# Altium PCB traffic_light_PCB.PcbDoc
Units mil, origin at the board's own origin, x right, y up, seen from the top; angles counter-clockwise.
Board outline 6000 x 4000 mil, 2 copper layers (Top Layer, Bottom Layer); 27 components, 45 nets, 193 pads, 1 vias.
Unrouted connection lines stored in the file: 2.
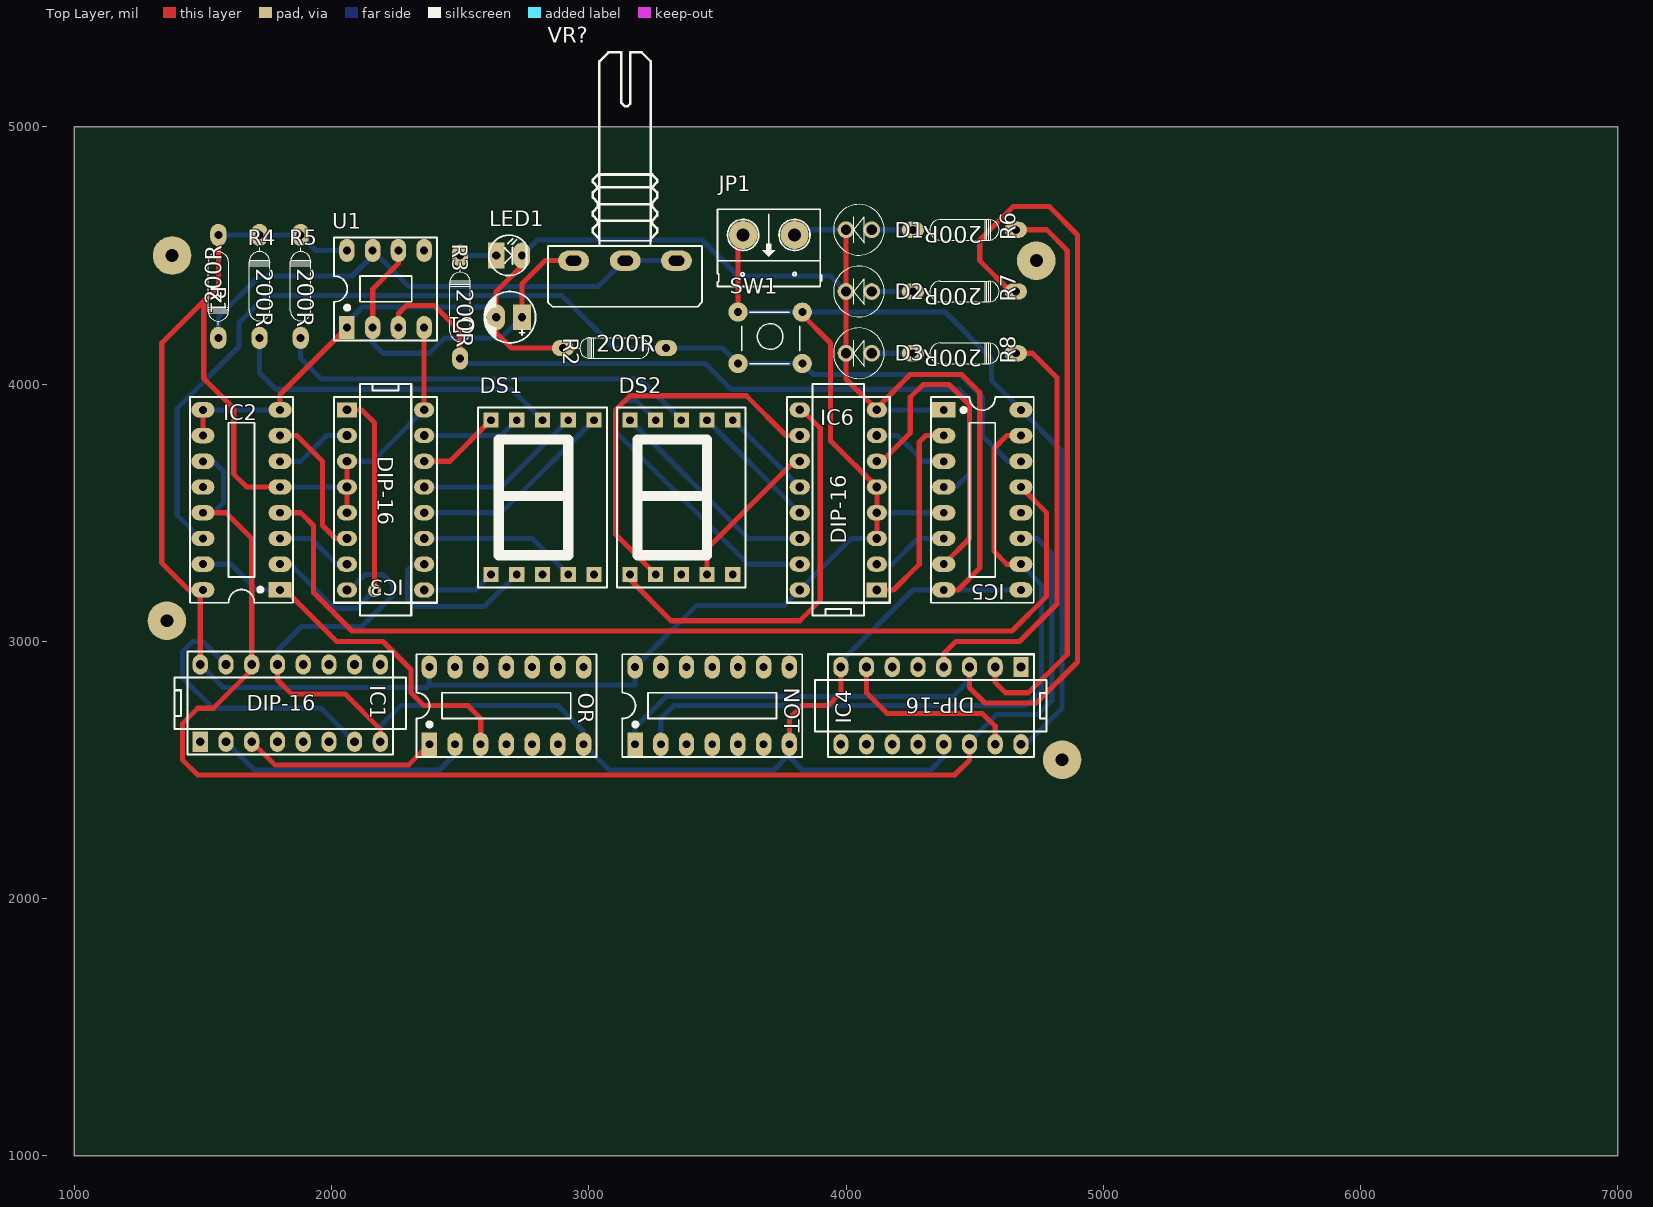
[diagram p0: Top Layer view]
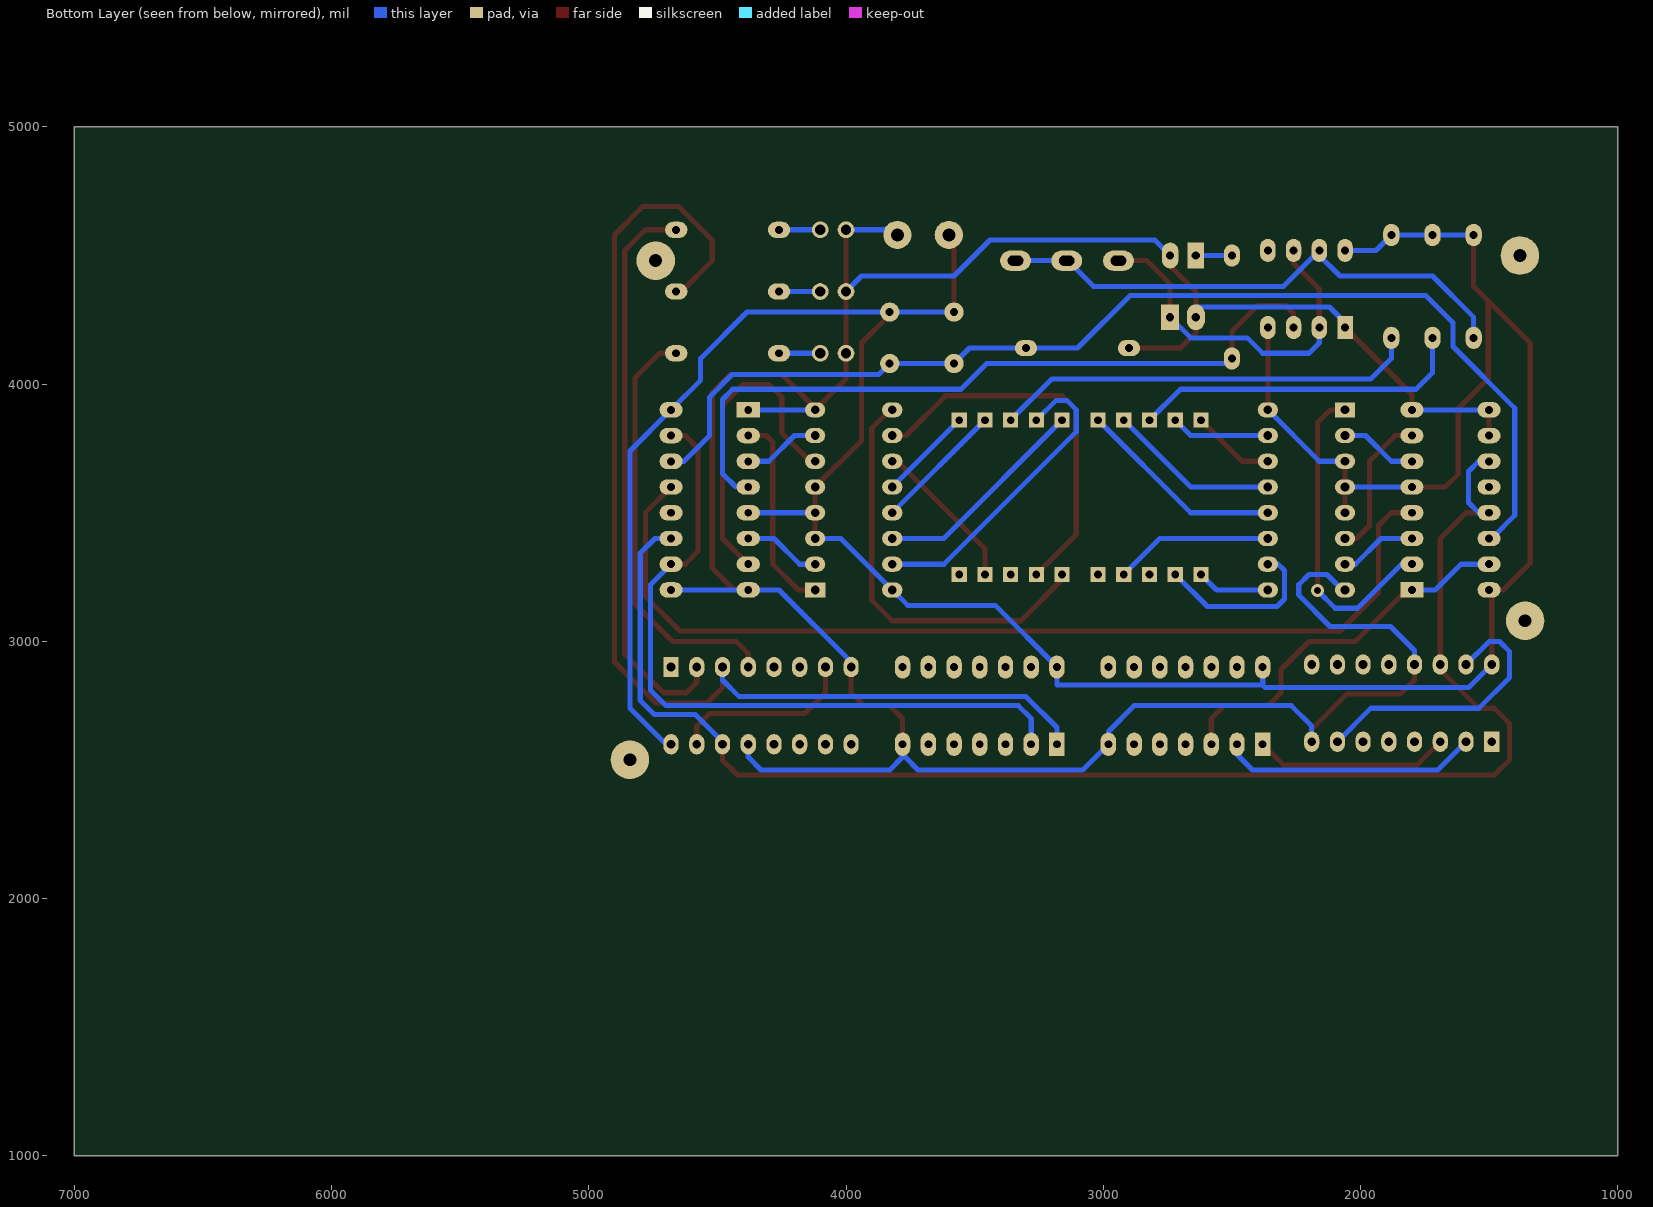
[diagram p1: Bottom Layer view, seen from below]
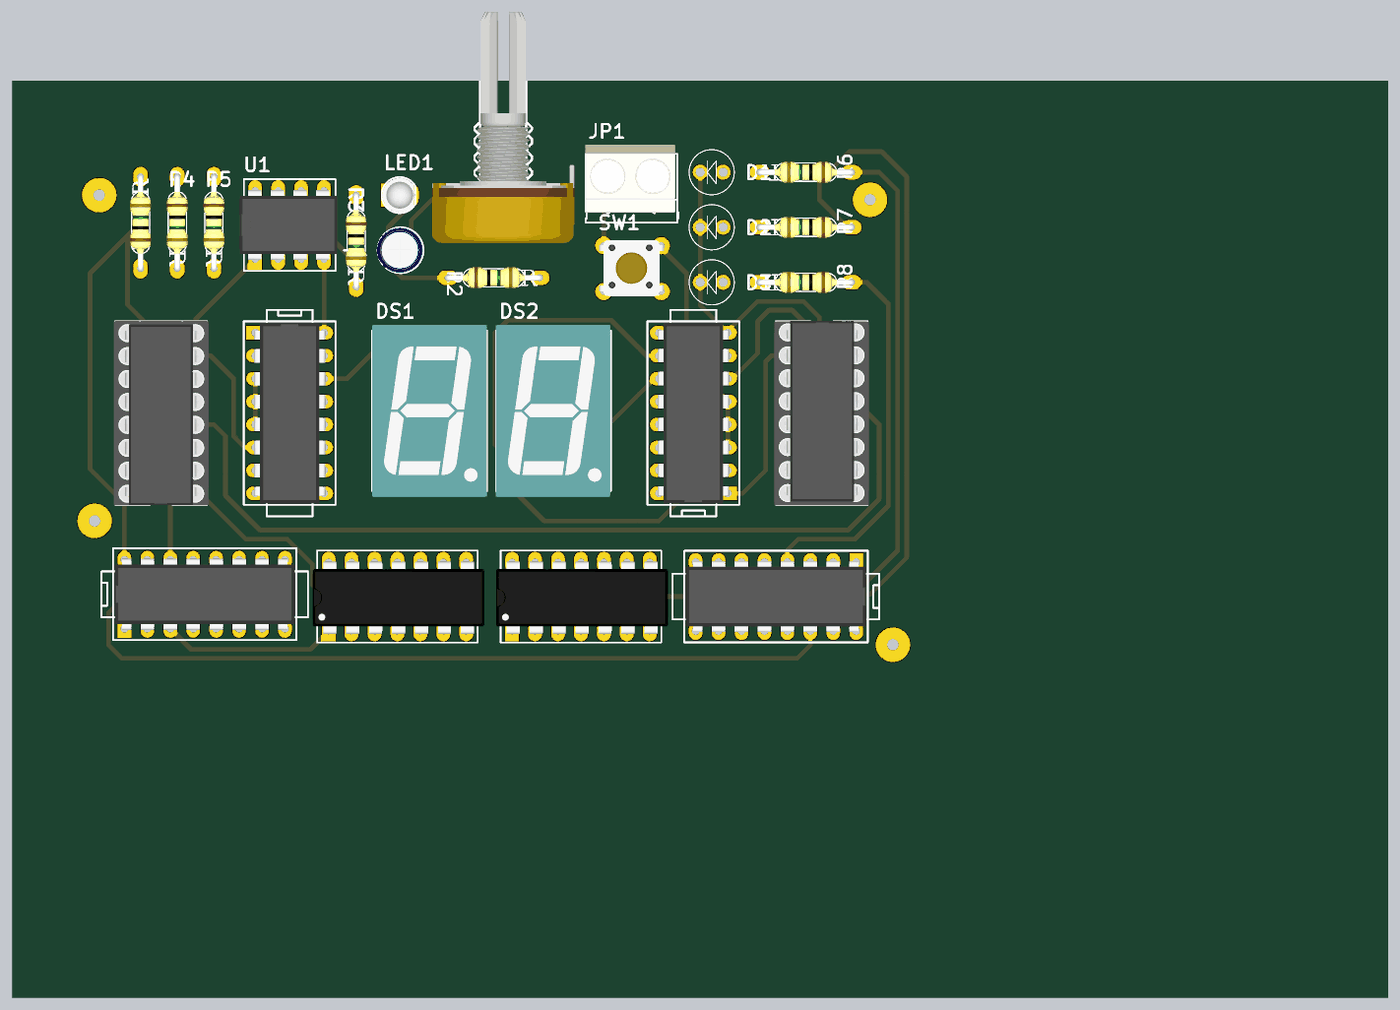
[diagram p2: 3D render of the assembled board from above, using the file's embedded part models]

## Layer stack, top to bottom
Top Solder: solder mask 0.4, Solder Resist, Dk 3.5
Top Layer: signal copper 1.4
Dielectric 1: dielectric 12.6, FR-4, Dk 4.8
Bottom Layer: signal copper 1.4
Bottom Solder: solder mask 0.4, Solder Resist, Dk 3.5

## Board outline
1000,1000 7000,1000 7000,5000 1000,5000

## Design rules (kind name [scope] priority, off if disabled: settings)
Clearance [All] p1: gap=15
PolygonConnect [All] p1: connectstyle=Relief reliefconductorwidth=10 reliefentries=4 polygonreliefangle="90 Angle" airgapwidth=10
RoutingVias [All] p1: holewidth=28 width=50 viastyle="Through Hole" minholewidth=28 minwidth=50 maxholewidth=28 maxwidth=50
SolderMaskExpansion [All] p1: expansion=4
Width [All] p1: maxlimit=30 minlimit=20 preferedwidth=20 minimp=50.000000 maximp=50.000000 favimp=50.000000
30 further rules are at their usual default settings.

## Components (designator, comment, footprint, x,y, rotation, side; value= is the part's Value field where it differs from the comment)
C1 "Cap Pol" CP1/2 2740,4260 r180 top
D1 "LED-RED-5MM" LED-5MM-RED 4100,4600 r180 top
D2 "LED-YELLOW-5MM" LED-5MM-YELLOW 4100,4360 r180 top
D3 "LED-GREEN-5MM" LED-5MM-GREEN 4100,4120 r180 top
DS1 "7SEG-A" LED7SEG 2819,3560 r0 top
DS2 "7SEG-A" LED7SEG 3359,3560 r0 top
IC1 "4017" DIP16 1840,2760 r0 top
IC2 "74193" DIP16/W0.3 1800,3200 r90 top
IC3 "7447" DIP16 2210.08,3549.71 r270 top
IC4 "4017" DIP16 4329.71,2749.92 r180 top
IC5 "74193" DIP16/W0.3 4380,3900 r270 top
IC6 "7447" DIP16 3969.92,3550.29 r90 top
JP1 "Header 2_1" HED2 3800,4580 r180 top
LED1 "LED" LED-3MM-WHITE 2640,4500 r0 top
NOT "7404" DIP14/W0.3 3180,2600 r0 top
OR "7432" DIP14/W0.3 2380,2600 r0 top
R1 "R0.4W" "DIEN TRO 1/4 W" 1560,4180 r90 top
R2 "R0.4W" "DIEN TRO 1/4 W" 2900,4140 r0 top
R3 "R0.4W" "DIEN TRO 1/4 W" 2500,4500 r270 top
R4 "R0.4W" "DIEN TRO 1/4 W" 1720,4580 r270 top
R5 "R0.4W" "DIEN TRO 1/4 W" 1880,4580 r270 top
R6 "R0.4W" "DIEN TRO 1/4 W" 4660,4600 r180 top
R7 "R0.4W" "DIEN TRO 1/4 W" 4660,4360 r180 top
R8 "R0.4W" "DIEN TRO 1/4 W" 4660,4120 r180 top
SW1 "SW" SW4 3580,4280 r0 top
U1 "NE555" DIP8 2205,4370 r0 top
VR? "50K" VR-S1 3141,4480 r180 top

## Footprints (in the part's own frame and the unit in brackets; to place one, negate y for a bottom-side part, rotate by r counter-clockwise, add the part's x,y. Pads: shape width x height; smd on the part's side, far side on the other; paste and mask are expansions set on the pad)
CP1/2 [mil] "Tu hoa < 22uF/16>50V"
  rect 70x100 hole 32: 1(0,0)
  oval 70x100 hole 32: 2(100,0)
  silkscreen extent -53,-100 147,100, body extent -49,-99 149,99, height 287
"DIEN TRO 1/4 W" [mm]
  oval 2.2x1.6 hole 0.787: 1(0,0) 2(10.16,0)
  silkscreen extent 1.26,-1.02 8.88,1.02, body extent -0.3,-1.16 10.46,1.16, height 2.93
DIP8 [mil] "DIP, 8-Leads, Row Spacing 7.62mm, Pitch 2.54mm, Body 9.91x6.73mm"
  rect 60x90 hole 31: 1(-145,-150)
  oval 60x90 hole 31: 2(-45,-150) 3(55,-150) 4(155,-150) 5(155,150) 6(55,150) 7(-45,150) 8(-145,150)
  silkscreen extent -195,-200 205,200, body extent -213,-153 213,153, height 177
DIP14/W0.3 [mil] "14PIN, W 300mil, Pin to pin 100mil"
  rect 60x90 hole 31: 1(0,0)
  oval 60x90 hole 31: 2(100,0) 3(200,0) 4(300,0) 5(400,0) 6(500,0) 7(600,0) 8(600,300) 9(500,300) 10(400,300) 11(300,300) 12(200,300) 13(100,300) 14(0,300)
  silkscreen extent -50,-50 650,350, body extent -70,-12 680,302, height 145
DIP16 [mm]
  rect 1.5x2 hole 0.864: 1(-8.897,-3.812)
  oval 1.5x2 hole 0.864: 2(-6.357,-3.812) 3(-3.817,-3.812) 4(-1.277,-3.812) 5(1.263,-3.812) 6(3.803,-3.812) 7(6.343,-3.812) 8(8.883,-3.812) 9(8.883,3.808) 10(6.343,3.808) 11(3.803,3.808) 12(1.263,3.808) 13(-1.277,3.808) 14(-3.817,3.808) 15(-6.357,3.808) 16(-8.897,3.808)
  silkscreen extent -11.44,-5.08 11.42,5.08, body extent -10,-3.93 10,3.94, height 1.99
DIP16/W0.3 [mil] "16 PIN, W 300mil, Pin to pin 100mil"
  rect 60x90 hole 31: 1(0,0)
  oval 60x90 hole 31: 2(100,0) 3(200,0) 4(300,0) 5(400,0) 6(500,0) 7(600,0) 8(700,0) 9(700,300) 10(600,300) 11(500,300) 12(400,300) 13(300,300) 14(200,300) 15(100,300) 16(0,300)
  silkscreen extent -50,-50 750,350, body extent -52,-57 752,356, height 299
HED2 [mil] "Header 2, 2 pin, hight 300mil, Pin to Pin 200, Colour Green"
  round 110 hole 50: 1(0,0) 2(200,0)
  silkscreen extent -106,-100 300,200, body extent -92,-140 302,155, height 394
LED7SEG [mil] "LED7SEG"
  round 60 on Top Overlay: 0(186,-210)
  rect 59.06x59.06 hole 30: 1(-199,-300) 2(-99,-300) 3(1,-300) 4(101,-300) 5(201,-300) 6(201,300) 7(101,300) 8(1,300) 9(-99,300) 10(-199,300)
  silkscreen extent -249,-350 251,350, body extent -250,-375 250,375, height 316
LED-3MM-WHITE [mil] "LED 2 PIN, 3ly Only colour"
  rect 65x100 hole 32: 1(0,0)
  oval 65x100 hole 32: 2(100,0)
  silkscreen extent -29,-78 118,79, body extent -25,-75 113,75, height 217
LED-5MM-GREEN [mil]
  round 65 hole 40: A(0,0) K(100,0)
  silkscreen extent -48,-98 148,98, body extent -54,-105 155,105, height 370
LED-5MM-RED [mil]
  round 65 hole 40: A(0,0) K(100,0)
  silkscreen extent -48,-98 148,98, body extent -54,-105 155,105, height 370
LED-5MM-YELLOW [mil]
  round 65 hole 40: A(0,0) K(100,0)
  silkscreen extent -48,-98 148,98, body extent -54,-105 155,105, height 370
SW4 [mil] "SW button 4pin, 250 x250 mil"
  round 75 hole 31: 1(0,0) 2(250,-200) 3(250,0) 4(0,-200)
  silkscreen extent 15,-215 240,0, body extent -36,-220 276,24, height 276
VR-S1 [mil]
  oval 120x78.74 hole 40 slot 60 at 0 deg: 1(-200,0) 2(-1,0) 3(200,0)
  silkscreen extent -299,-810 300,179, body extent -310,-818 310,188, height 839

## Part data
C1: "Polarized Capacitor (Radial)"
DS1 DS2: library part LED7SEG-A, "14.2 mm General Purpose Blue 7-Segment Display: CA, RH DP, Gray Surface"
IC1 IC4: "Decade Counter/Divider with 10 Decoded Outputs"
IC2 IC5: "Synchronous 4-Bit Up/Down Counter"
IC3 IC6: "BCD to 7-Segment Decoder/Driver"
JP1: "Header, 2-Pin"
LED1: "LED Single colour Green and Red"
NOT: "Hex Inverter"
OR: "Quad 2-Input OR Gate"
R1 R2 R3 R4 R5 R6 R7 R8: library part "Res 1/4 W", "Resistor"
SW1: library part SW4-1, "Switch button 4 pin"
U1: "TIMER IC"
VR?: library part VR-S, "Var Resistor"

## Free pads (board coordinates)
  round 150 hole 50: 2(1380,4500) 3(1360,3080) 4(4840,2540) 5(4740,4480)

## Via types
v1: diameter 50, hole 28, Top Layer to Bottom Layer, 1 vias

## Nets (pads, with @x,y where several pads share a name; then routed paths per layer and width w, separated by ;. In a path a pad name is that pad's centre, name@x,y a point inside that pad or via, vN(x,y) a via of type N, cw(c..) or ccw(c..) an arc to the next point about the centre after c; other vN are vias at no path point)
GND: C1.2 D1.K D2.K D3.K IC1.8 IC1.13 IC2.8 IC2.9 IC2.10 IC3.8 IC4.8 IC4.13 IC5.1 IC5.8 IC5.9 IC6.8 JP1.1 LED1.2 NOT.7 OR.7 R2.1 U1.1 | length 11363.1
  Top Layer w20: IC2.10 IC2.9 ; IC1.13 1789.71,2850 1843.71,2796 2052,2796 2189.71,2658.29 IC1.8 ; IC2.8 1800,3960 U1.1 ; LED1.2 2740,4460 2640,4360 C1.2 2640,4200 2700,4140 R2.1 ; NOT.7 3780,2700 3830,2750 3930,2750 3980,2800 IC4.8 ; D1.K D2.K D3.K 4000,4020 IC6.8 4120,3907 4250,4037 4450,4037 4520,3967 4520,3285 4435,3200 IC5.8
  Bottom Layer w20: IC2.9 IC2.8 ; IC1.13 1789.71,2965 1882.71,3058 2118,3058 2240,3180 2240,3220 2200,3260 2130,3260 2070,3200 IC3.8 ; U1.1 2060,4240 2120,4300 2640,4300 C1.2 ; IC1.8 2189.71,2670.71 2269,2750 2880,2750 2980,2650 OR.7 3080,2500 3720,2500 3770,2550 3780,2550 ; LED1.2 2800,4560 3440,4560 3580,4420 3940,4420 D2.K ; NOT.7 3780,2550 ; JP1.1 3800,4600 D1.K ; IC4.8 3980,2920 4260,3200 IC5.8 IC5.9 ; IC6.8 IC5.1 ; IC4.13 4380,2550 4330,2500 3830,2500 3780,2550
NetC1_1: C1.1 U1.2 U1.6 VR?.3 | length 1422.3
  Top Layer w20: U1.2 2160,4370 2260,4470 U1.6 ; C1.1 2740,4390 2830,4480 VR?.3@2939,4480
  Bottom Layer w20: U1.2 2160,4160 2200,4120 2380,4120 2440,4180 2660,4180 C1.1
NetD1_A: D1.A R6.2 | length 160
  Bottom Layer w20: D1.A R6.2
NetD2_A: D2.A R7.2 | length 160
  Bottom Layer w20: D2.A R7.2
NetD3_A: D3.A R8.2 | length 160
  Bottom Layer w20: D3.A R8.2
NetDS1_1: DS1.1 IC3.9 | length 284.9
  Bottom Layer w20: IC3.9 2560,3200 DS1.1
NetDS1_2: DS1.2 IC3.10 | length 674.6
  Bottom Layer w20: IC3.10 2320,3300 2295,3275 2295,3165 2325,3135 2595,3135 DS1.2
NetDS1_3: DS1.3 DS1.8 R4.2 | length 1312.2
  Bottom Layer w20: R4.2 1720,4044 1784,3980 2700,3980 DS1.8
NetDS1_4: DS1.4 IC3.11 | length 618
  Bottom Layer w20: IC3.11 2780,3400 DS1.4
NetDS1_6: DS1.6 IC3.12 | length 809.1
  Bottom Layer w20: IC3.12 2660,3500 DS1.6
NetDS1_7: DS1.7 IC3.13 | length 667.7
  Bottom Layer w20: IC3.13 2660,3600 DS1.7
NetDS1_9: DS1.9 IC3.15 | length 384.9
  Bottom Layer w20: IC3.15 2660,3800 DS1.9
NetDS1_10: DS1.10 IC3.14 | length 326.3
  Top Layer w20: IC3.14 2460,3700 DS1.10
NetDS2_1: DS2.1 IC6.9 | length 1635.1
  Top Layer w20: DS2.1 3160,3240 3320,3080 3820,3080 3900,3160 3900,3828.63 IC6.9@3824.31,3904.31
NetDS2_2: DS2.2 IC6.10 | length 1506.2
  Top Layer w20: DS2.2 3105,3415 3105,3900 3160,3955 3612,3955 3767,3800 IC6.10
NetDS2_3: DS2.3 DS2.8 R5.2 | length 1659.4
  Bottom Layer w20: R5.2 1880,4100 1960,4020 3200,4020 DS2.8
NetDS2_4: DS2.4 IC6.11 | length 600.8
  Top Layer w20: DS2.4 3460,3360 3800,3700 IC6.11
NetDS2_6: DS2.6 IC6.12 | length 367.7
  Bottom Layer w20: DS2.6 IC6.12
NetDS2_7: DS2.7 IC6.13 | length 509.1
  Bottom Layer w20: DS2.7 IC6.13
NetDS2_9: DS2.9 IC6.15 | length 1215.5
  Bottom Layer w20: DS2.9 3183,3937 3142,3937 3105,3900 3105,3815 3620,3300 IC6.15
NetDS2_10: DS2.10 IC6.14 | length 850.5
  Bottom Layer w20: DS2.10 3620,3400 IC6.14
NetIC1_2: IC1.2 OR.2 | length 1000.7
  Bottom Layer w20: IC1.2 1699.63,2500 2420,2500 2480,2560 OR.2
NetIC1_3: IC1.3 OR.1 | length 760.7
  Top Layer w20: IC1.3 1779.63,2520 2300,2520 OR.1
NetIC1_7: IC1.7 IC1.15 | length 1096.9
  Bottom Layer w20: IC1.15 1499.63,3000 1460,3000 1420,2960 1420,2860 1540,2740 1959.63,2740 IC1.7
NetIC1_14: IC1.14 IC2.11 IC2.13 IC4.14 IC5.11 | length 5834.9
  Top Layer w20: IC2.13 1589.71,3500 1689.71,3400 IC1.14 1689.71,2889.71 1540,2740 1480,2740 1420,2680 1420,2540 1480,2480 4422,2480 4480,2538 IC4.14
  Bottom Layer w20: IC2.13 1540,3500 1580,3540 1580,3660 1540,3700 IC2.11 ; IC4.14 4480,2610 4585,2715 4745,2715 4800,2770 4800,3343 4743,3400 IC5.11
NetIC2_1: IC2.1 IC2.15 OR.3 | length 1481.8
  Top Layer w20: IC2.1 1820,3200 2020,3000 2200,3000 2309,2891 2309,2800 2359,2750 2530,2750 2580,2700 OR.3
  Bottom Layer w20: IC2.15 1609.71,3300 1709.71,3200 IC2.1
NetIC2_2: IC2.2 IC3.1 | length 1246.1
  Top Layer w20: IC3.1 2117,3900 2167,3850 v1(2167,3198)
  Bottom Layer w20: IC2.2 1840,3300 2011,3129 2098,3129 v1(2167,3198)
NetIC2_3: IC2.3 IC3.7 | length 301.4
  Bottom Layer w20: IC2.3 1920,3400 2020,3300 IC3.7
NetIC2_4: IC2.4 IC5.13 | length 3845.2
  Top Layer w20: IC2.4 1880,3500 1930,3450 1930,3190 2080,3040 4645,3040 4780,3175 4780,3500 IC5.13
NetIC2_6: IC2.6 IC3.2 | length 301.4
  Bottom Layer w20: IC2.6 1880,3700 1980,3800 IC3.2
NetIC2_7: IC2.7 IC3.6 | length 572.1
  Top Layer w20: IC2.7 1865,3800 1965,3700 1965,3450 2015,3400 IC3.6
NetIC4_2: IC4.2 R6.1 | length 2221.8
  Top Layer w20: IC4.2 4580,2840 4620,2800 4710,2800 4860,2950 4860,4520 4780,4600 R6.1
NetIC4_3: IC4.3 NOT.1 R7.1 | length 4491.9
  Top Layer w20: IC4.3 4480,2820 4540,2760 4740,2760 4900,2920 4900,4580 4790,4690 4650,4690 4520,4560 4520,4480 4640,4360 R7.1
  Bottom Layer w20: NOT.1 3180,2665 3300,2785 4415,2785 4480,2850 IC4.3
NetIC4_4: IC4.4 R8.1 | length 1651.9
  Top Layer w20: IC4.4 4380,2953 4427,3000 4675,3000 4820,3145 4820,4025 4725,4120 R8.1
NetIC4_7: IC4.7 IC4.15 | length 723.8
  Top Layer w20: IC4.7 4080,2800 4160,2720 4530,2720 4580,2670 IC4.15
NetIC5_2: IC5.2 IC6.1 | length 786.8
  Top Layer w20: IC6.1 4185,3200 4285,3300 4285,3775 4310,3800 IC5.2
NetIC5_3: IC5.3 IC6.7 | length 301.4
  Bottom Layer w20: IC6.7 4200,3800 4300,3700 IC5.3
NetIC5_6: IC5.6 IC6.2 | length 301.4
  Bottom Layer w20: IC6.2 4180,3300 4280,3400 IC5.6
NetIC5_7: IC5.7 IC6.6 | length 1258.8
  Top Layer w20: IC6.6 4140,3700 4250,3810 4250,3949 4300,3999 4400,3999 4480,3919 4480,3400 IC5.7
NetIC5_10: IC5.10 IC5.15 NOT.2 | length 2800.1
  Top Layer w20: IC5.10 4625,3300 4575,3350 4575,3750 4625,3800 IC5.15
  Bottom Layer w20: NOT.2 3280,2700 3330,2750 4700,2750 4760,2810 4760,3220 IC5.10
NetLED1_1: LED1.1 R3.1 | length 160
  Bottom Layer w20: R3.1@2500,4480 R3.1 LED1.1
NetR1_1: R1.1 U1.7 VR?.1 VR?.2 | length 2077.6
  Bottom Layer w20: R1.1 1560,4260 1720,4420 2080,4420 2160,4500 U1.7 2300,4380 3037.11,4380 VR?.2@3139,4481.89 ; VR?.2@3140,4480 VR?.2 VR?.1@3339,4480
RST: IC2.14 IC5.14 R2.2 SW1.2 SW1.4 | length 4424.6
  Bottom Layer w20: IC2.14 1490,3400 1400,3490 1400,3906 1640,4146 1640,4239 1746,4345 2895,4345 3100,4140 R2.2 3520,4140 SW1.4 SW1.2 3873,4037 4443,4037 4530,3950 4530,3800 4630,3700 IC5.14
VCC: IC1.16 IC2.5 IC2.16 IC3.3 IC3.4 IC3.5 IC3.16 IC4.16 IC5.5 IC5.16 IC6.3 IC6.4 IC6.5 IC6.16 JP1.2 NOT.14 OR.14 R1.2 R4.1 R5.1 SW1.1 SW1.3 U1.4 U1.8 | length 11808.2
  Top Layer w20: IC1.16 IC2.16@1489.71,3200 ; IC2.16 IC2.16@1489.71,3200 ; R1.2 1560,4380 1503,4323 ; IC2.5 1670,3600 1620,3650 1620,3905 1503,4022 1503,4323 ; IC3.5 IC3.4 IC3.3 ; IC3.16 U1.4 ; SW1.1 3580,4560 JP1.2 ; SW1.3 3830,4270 3940,4160 3940,3780 IC6.5 IC6.4 IC6.3 ; IC2.16@1489.71,3200 1445,3200 1340,3305 1340,4160 1503,4323
  Bottom Layer w20: IC1.16 1579.63,2820 2370,2820 2380,2830 ; R1.2 R4.1 R5.1 1940,4520 U1.8 ; IC2.5 IC3.4 ; IC3.3 2160,3700 IC3.16 ; OR.14 2380,2830 ; SW1.1 SW1.3 4385,4280 4565,4100 4565,4015 IC5.16 4840,3740 4840,2740 4700,2600 IC4.16 ; IC6.3 4020,3400 IC6.16 3760,3140 3420,3140 NOT.14 3180,2830 2380,2830 ; IC6.4 IC5.5
ZZZ: IC5.4 R3.2 U1.3 | length 2909.7
  Top Layer w20: U1.3 2260,4275 2290,4305 2400,4305 2500,4205 R3.2
  Bottom Layer w20: R3.2 2520,4080 3453,4080 3553,3980 4440,3980 4480,3940 4480,3652 4428,3600 IC5.4
pads on no net: DS1.0 DS1.5 DS2.0 DS2.5 IC1.1 IC1.4 IC1.5 IC1.6 IC1.9 IC1.10 IC1.11 IC1.12 IC2.12 IC4.1 IC4.5 IC4.6 IC4.9 IC4.10 IC4.11 IC4.12 IC5.12 NOT.3 NOT.4 NOT.5 NOT.6 NOT.8 NOT.9 NOT.10 NOT.11 NOT.12 NOT.13 OR.4 OR.5 OR.6 OR.8 OR.9 OR.10 OR.11 OR.12 OR.13 U1.5

## Text inside footprints (layer, text, board x,y; h text height)
IC1: Top Overlay "DIP-16" at 1669.71,2729.92 h59.05
IC3: Top Overlay "DIP-16" at 2180,3720 h59.05 r270
IC4: Top Overlay "DIP-16" at 4500,2780 h59.05 r180
IC6: Top Overlay "DIP-16" at 4000,3380 h59.05 r90
R1: Top Overlay "200R" at 1595,4310 h110.24 r90
R2: Top Overlay "200R" at 3030,4105 h110.24
R3: Top Overlay "200R" at 2465,4370 h110.24 r270
R4: Top Overlay "200R" at 1685,4450 h110.24 r270
R5: Top Overlay "200R" at 1845,4450 h110.24 r270
R6: Top Overlay "200R" at 4530,4635 h110.24 r180
R7: Top Overlay "200R" at 4530,4395 h110.24 r180
R8: Top Overlay "200R" at 4530,4155 h110.24 r180